# Altium PCB ChassisController.PcbDoc (part 1 of 2)
Units mm, origin at the board's own origin, x right, y up, seen from the top; angles counter-clockwise.
Board outline 110.4 x 66.5 mm, 2 copper layers (Top Layer, Bottom Layer), stack 1.906 mm thick; 125 components, 214 nets, 559 pads, 255 vias.
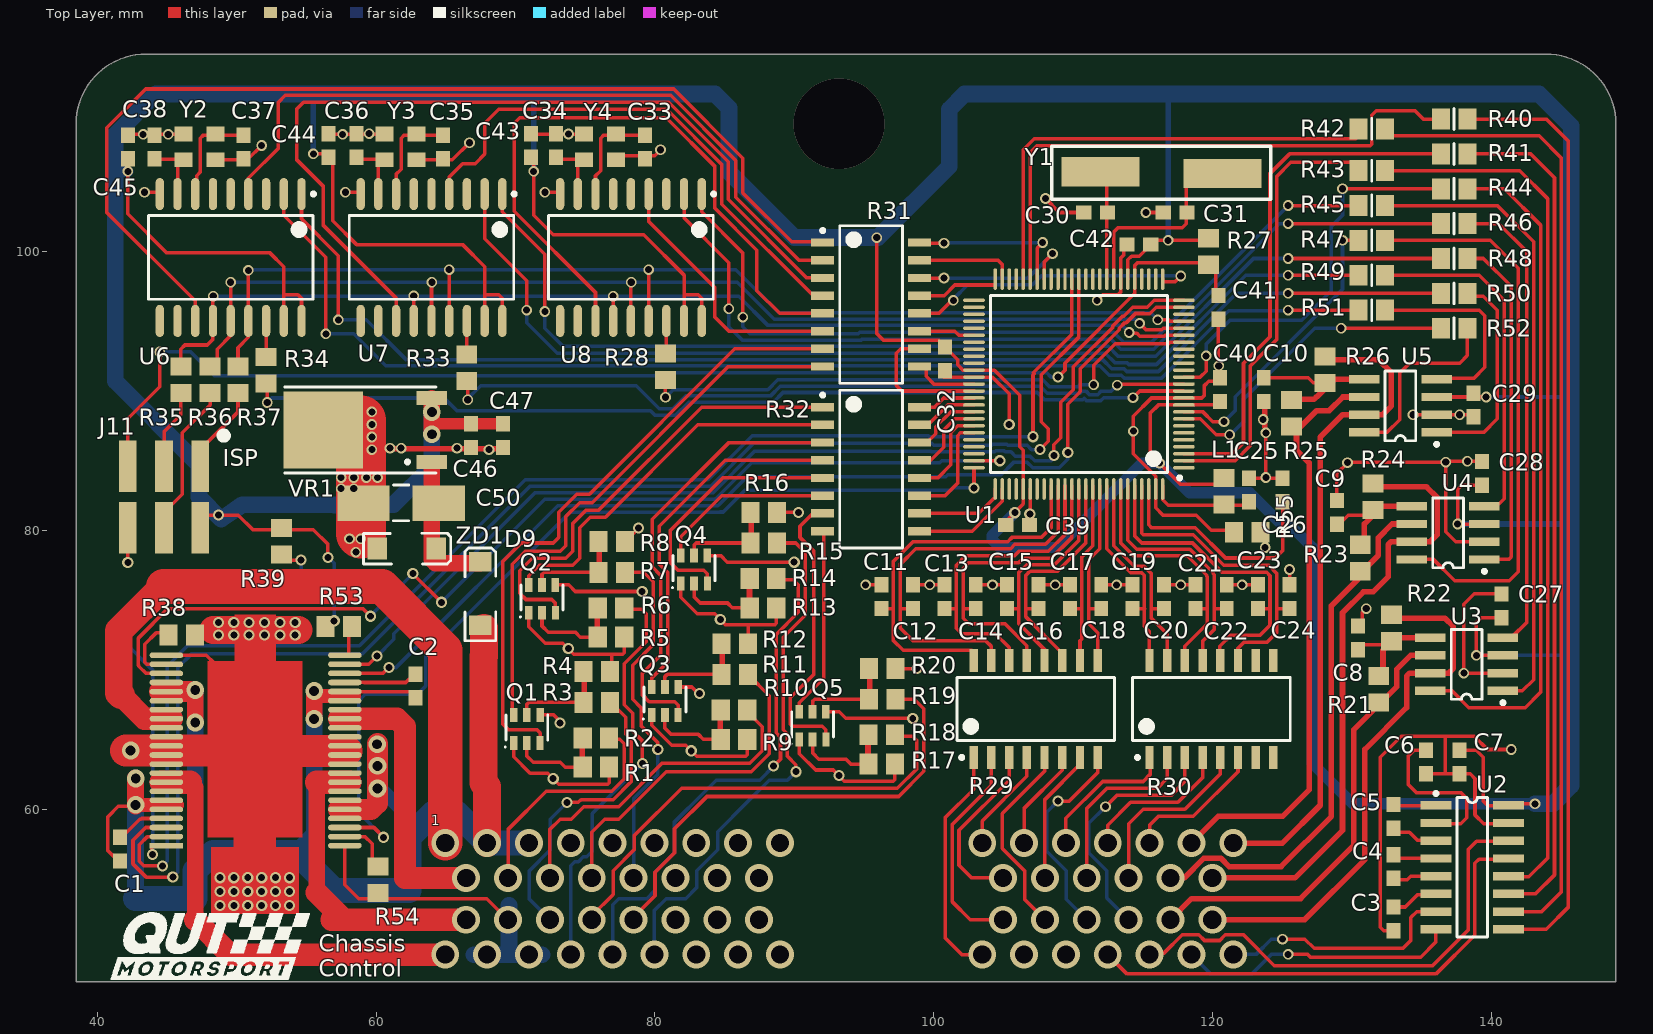
[diagram p0: Top Layer view]
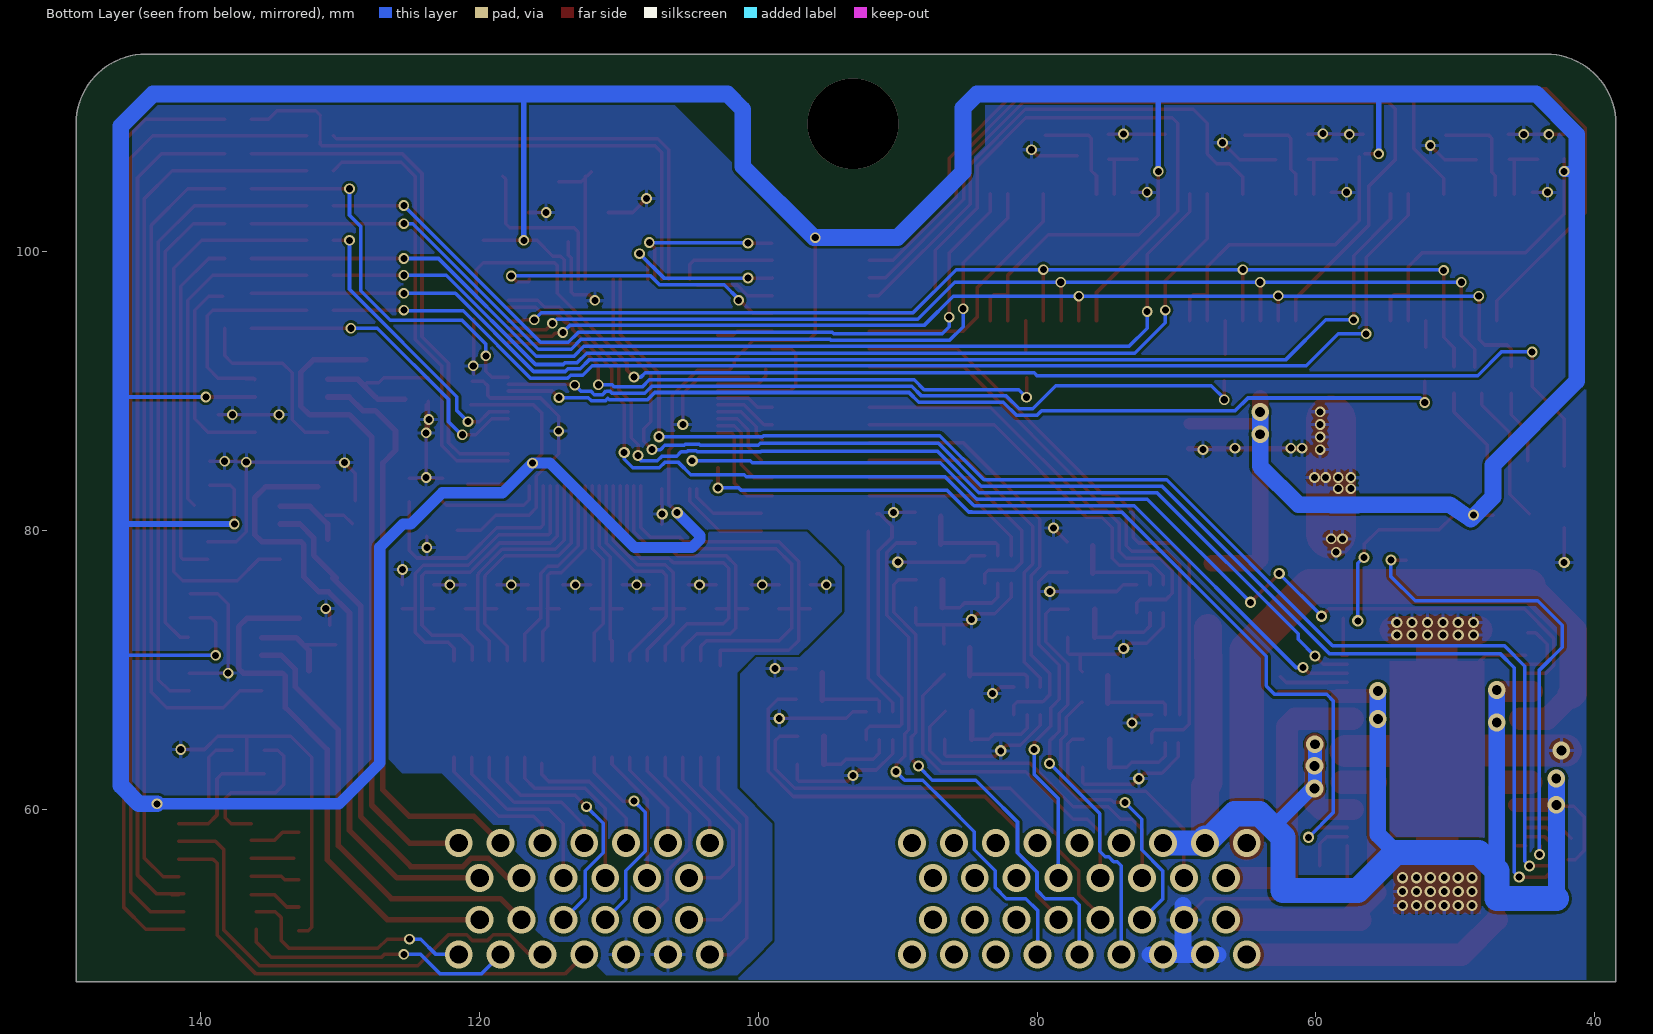
[diagram p1: Bottom Layer view, seen from below]

## Layer stack, top to bottom
Top Solder: solder mask 0.0102, Solder Resist, Dk 3.5
Top Layer: signal copper 0.203
Dielectric1: core 1.5, FR-4, Dk 4.8
Bottom Layer: signal copper 0.203
Bottom Solder: solder mask 0.0102, Solder Resist, Dk 3.5

## Board outline
38.497,47.652 148.897,47.652 148.897,109.152 ccw(c143.897,109.152) 143.897,114.152 43.497,114.152 ccw(c43.497,109.152) 38.497,109.152

## Design rules (kind name [scope] priority, off if disabled: settings)
Clearance [All] p1: gap=0.2 ignorepadtopadclearanceinfootprint=FALSE except(0: Arc-Hole Track-Hole SMDPad-Hole THPad-Hole Via-Hole Fill-Hole Poly-Hole Region-Hole Text-Hole)
FabricationTestPointUsage TestPointUsage [All] p1: valid=0 allowmultiple=FALSE
FabricationTestpoint Testpoint [All] p1: side=3 testpointundercomponent=TRUE minsize=1.016 maxsize=2.54 preferedsize=1.524 minholesize=0 maxholesize=1.016 preferedholesize=0.813 testpointgrid=0.025 allowsidetop=TRUE allowsidebottom=TRUE usegrid=TRUE gridtolerance=0
HoleSize [All] p1: absolutevalues=TRUE maxlimit=10 minlimit=0.025 maxpercent=80.000 minpercent=20.000
PolygonConnect [All] p1: connectstyle=Relief reliefconductorwidth=0.254 reliefentries=4 polygonreliefangle="90 Angle" airgapwidth=0.254
RoutingVias [All] p1: holewidth=0.6 width=1 viastyle="Through Hole" minholewidth=0.5 minwidth=0.5 maxholewidth=10 maxwidth=5
SilkToSolderMaskClearance SilkscreenOverComponentPads [IsPad] p1: minsilkscreentomaskgap=0.254 clearancetoexposedcopper=TRUE
SolderMaskExpansion [(IsVia)] p1: expansion=-1 istentingtop=FALSE
Width [All] p1: maxlimit=10 minlimit=0.2 preferedwidth=0.254 minimp=50.000000 maximp=50.000000 favimp=50.000000
26 further rules are at their usual default settings.

## Components (designator, comment, footprint, x,y, rotation, side; value= is the part's Value field where it differs from the comment)
C1 "Comment" J1-0603 41.625,57.15 r90 top
C2 "Comment" J1-0603 62.825,68.85 r90 top
C3 "Comment" J1-0603 132.95,52.15 r270 top
C4 "Comment" J1-0603 132.95,55.9 r270 top
C5 "Comment" J1-0603 132.95,59.5 r270 top
C6 "Comment" J1-0603 135.3,63.4 r90 top
C7 "Comment" J1-0603 137.7,63.4 r270 top
C8 "Comment" J1-0603 130.4,72.3 r270 top
C9 "Comment" J1-0603 128.9,81.3 r270 top
C10 "Comment" J1-0603 123.65,90.1 r90 top
C11 "Comment" J1-0603 96.25,75.25 r270 top locked
C12 "Comment" J1-0603 98.5,75.25 r270 top locked
C13 "Comment" J1-0603 100.75,75.25 r270 top locked
C14 "Comment" J1-0603 103,75.25 r270 top locked
C15 "Comment" J1-0603 105.25,75.25 r270 top locked
C16 "Comment" J1-0603 107.5,75.25 r270 top locked
C17 "Comment" J1-0603 109.75,75.25 r270 top locked
C18 "Comment" J1-0603 112,75.25 r270 top locked
C19 "Comment" J1-0603 114.25,75.25 r270 top locked
C20 "Comment" J1-0603 116.5,75.25 r270 top locked
C21 "Comment" J1-0603 118.75,75.25 r270 top locked
C22 "Comment" J1-0603 121,75.25 r270 top locked
C23 "Comment" J1-0603 123.25,75.25 r270 top locked
C24 "Comment" J1-0603 125.5,75.25 r270 top
C25 "Comment" J1-0603 122.6,82.9 r90 top
C26 "Comment" J1-0603 125,82.9 r90 top
C27 "Comment" J1-0603 140.7,74.6 r270 top
C28 "Comment" J1-0603 139.3,84.1 r270 top
C29 "Comment" J1-0603 138.7,89 r270 top
C30 "Comment" J1-0603 111.6,102.8 r180 top
C31 "Comment" J1-0603 117.3,102.8 r0 top
C32 "Comment" J1-0603 100.8,92.3 r270 top
C33 "Comment" J1-0603 79.3,107.5 r270 top
C34 "Comment" J1-0603 72.9,107.6 r270 top
C35 "Comment" J1-0603 64.8,107.5 r270 top
C36 "Comment" J1-0603 58.6,107.6 r270 top
C37 "Comment" J1-0603 50.5,107.5 r270 top
C38 "Comment" J1-0603 44.1,107.5 r270 top
C39 "Comment" J1-0603 106,80.4 r0 top
C40 "Comment" J1-0603 120.5,90.1 r90 top
C41 "Comment" J1-0603 120.4,96 r90 top
C42 "Comment" J1-0603 114.7,100.5 r180 top
C43 "Comment" J1-0603 71.1,107.6 r270 top
C44 "Comment" J1-0603 56.6,107.6 r270 top
C45 "Comment" J1-0603 42.2,107.5 r270 top
C46 "Comment" J1-0603 66.8,86.8 r270 top
C47 "Comment" J1-0603 69.1,86.8 r270 top
C50 "Comment" 6332[2512] 61.6,82.4 r180 top
D9 "Comment" SMC#1 67.475,74 r90 top
J11 "ISP" ISP_SMD_6PIN 44.8,82.4 r270 top
L1 "Comment" 2012[0805]#1 120.8,82.8 r270 top
Q1 "Comment" SOT23-6 70.816,65.575 r0 top
Q2 "Comment" SOT23-6 71.9,74.9 r0 top
Q3 "Comment" SOT23-6 80.716,67.575 r0 top
Q4 "Comment" SOT23-6 82.8,77 r0 top
Q5 "Comment" SOT23-6 91.3,65.8 r0 top
R1 "Comment" 2012[0805]#1 75.766,63.025 r0 top
R2 "Comment" 2012[0805]#1 75.766,65.125 r0 top
R3 "Comment" 2012[0805]#1 75.816,67.675 r0 top
R4 "Comment" 2012[0805]#1 75.816,69.875 r0 top
R5 "Comment" 2012[0805]#1 76.85,72.35 r0 top
R6 "Comment" 2012[0805]#1 76.85,74.45 r0 top
R7 "Comment" 2012[0805]#1 76.9,77 r0 top
R8 "Comment" 2012[0805]#1 76.9,79.2 r0 top
R9 "Comment" 2012[0805]#1 85.666,65.025 r0 top
R10 "Comment" 2012[0805]#1 85.666,67.125 r0 top
R11 "Comment" 2012[0805]#1 85.716,69.675 r0 top
R12 "Comment" 2012[0805]#1 85.716,71.875 r0 top
R13 "Comment" 2012[0805]#1 87.75,74.45 r0 top
R14 "Comment" 2012[0805]#1 87.75,76.55 r0 top
R15 "Comment" 2012[0805]#1 87.8,79.1 r0 top
R16 "Comment" 2012[0805]#1 87.8,81.3 r0 top
R17 "Comment" 2012[0805]#1 96.25,63.25 r0 top
R18 "Comment" 2012[0805]#1 96.25,65.35 r0 top
R19 "Comment" 2012[0805]#1 96.3,67.9 r0 top
R20 "Comment" 2012[0805]#1 96.3,70.1 r0 top
R21 "Comment" 2012[0805]#1 131.9,68.605 r270 top
R22 "Comment" 2012[0805]#1 132.8,73.005 r270 top
R23 "Comment" 2012[0805]#1 130.572,78.026 r270 top
R24 "Comment" 2012[0805]#1 131.472,82.426 r270 top
R25 "Comment" 2012[0805]#1 125.65,88.4 r270 top
R26 "Comment" 2012[0805]#1 128.05,91.535 r270 top
R27 "Comment" 2012[0805]#1 119.7,100 r270 top
R28 "Comment" 2012[0805]#1 80.75,91.75 r90 top
R29 "10K 8pack" SO-16 107.3,67.2 r0 top locked
R30 "10K 8pack" SO-16 119.9,67.2 r0 top locked
R31 "1K 8pack" SO-16 95.5,96.2 r270 top
R32 "1K 8pack" SO-16 95.5,84.4 r270 top
R33 "Comment" 2012[0805]#1 66.5,91.675 r90 top
R34 "Comment" 2012[0805]#1 52.1,91.5 r90 top
R35 "Comment" 2012[0805]#1 46,90.8 r90 top
R36 "Comment" 2012[0805]#1 48.1,90.8 r90 top
R37 "Comment" 2012[0805]#1 50.1,90.8 r90 top
R38 "Comment" 2012[0805]#1 46.075,72.5 r180 top
R39 "Comment" 2012[0805]#1 53.225,79.225 r90 top
R40 "Comment" 0805_SAE 137.3,109.5 r270 top
R41 "Comment" 0805_SAE 137.3,107 r270 top
R42 "Comment" 0805_SAE 131.4,108.8 r270 top
R43 "Comment" 0805_SAE 131.4,105.8 r270 top
R44 "Comment" 0805_SAE 137.3,104.5 r270 top
R45 "Comment" 0805_SAE 131.4,103.3 r270 top
R46 "Comment" 0805_SAE 137.3,102 r270 top
R47 "Comment" 0805_SAE 131.4,100.8 r270 top
R48 "Comment" 0805_SAE 137.3,99.5 r270 top
R49 "Comment" 0805_SAE 131.4,98.3 r270 top
R50 "Comment" 0805_SAE 137.3,97 r270 top
R51 "Comment" 0805_SAE 131.4,95.8 r270 top
R52 "Comment" 0805_SAE 137.3,94.5 r270 top
R53 "Comment" 2012[0805]#1 57.325,73.1 r180 top
R54 "Comment" 2012[0805]#1 60.15,54.95 r90 top
R55 "Comment" 2012[0805]#1 122.475,79.875 r0 top
U1 "main" SOT407-1_L 110.4,90.5 r180 top locked
U2 "Comment" SOIC16 138.6,55.845 r270 top
U3 "CAN xcvr" SO8 138.2,70.405 r90 top
U4 "CAN xcvr" SO8 136.872,79.826 r90 top
U5 "CAN xcvr" SO8 133.45,88.935 r90 top
U6 "Comment" SOL-18_N 49.575,99.575 r270 top
U7 "Comment" SOL-18_N 63.975,99.575 r270 top
U8 "Comment" SOL-18_N 78.275,99.575 r270 top
VR1 "" 369A-13 59.9,87.2 r90 top
Y1 "Comment" 2012[0805]#2 119.75,105.625 r180 top
Y2 "Comment" SOT223 50.1,109.825 r270 top
Y3 "Comment" SOT223 64.5,109.825 r270 top
Y4 "Comment" SOT223 78.8,109.825 r270 top
ZD1 "Comment" SMC#2 60.6,78.7 r0 top

## Footprints (in the part's own frame and the unit in brackets; to place one, negate y for a bottom-side part, rotate by r counter-clockwise, add the part's x,y. Pads: shape width x height; smd on the part's side, far side on the other; paste and mask are expansions set on the pad)
369A-13 [mm] "D-PAK/TO-252-AA; 3 Leads (1 Cropped); Body 10.3 (inc. leads) x 6.7 mm (LxW max)"
  rect 1x2.2 smd: 1(-2.285,-4.1) 3(2.285,-4.1)
  rect 5.5x5.7 smd: 4(0,3.7)
  silkscreen extent -3.09,-4.4 3.09,6.45
0805_SAE [mm]
  rect 1.5x1.3 smd: 1(0,-0.95) 2(0,0.95)
  silkscreen extent -0.75,0 0.75,0, body extent -0.67,-1.05 0.68,1.05, height 0.6
2012[0805]#1 [mm] "Chip Resistor; Body 2.0 x 1.3 mm (LxW typ)"
  rect 1.3x1.5 smd: 1(-0.95,0) 2(0.95,0)
2012[0805]#2 [mm] "Chip Resistor; Body 2.0 x 1.3 mm (LxW typ)"
  rect 5.6x2.1 smd: 1(-0.95,0.025) 2(7.8,-0.1)
6332[2512] [mm] "Chip Resistor; Body 6.3 x 3.2 mm (LxW typ)"
  rect 3.75x2.55 smd: 1(-2.9,0.45) 2(2.5,0.45)
  silkscreen extent -0.75,-0.85 0.35,1.7
ISP_SMD_6PIN [mm]
  rect 3.68x1.27 smd: 1(-2.2,2.6) 2(2.2,2.6) 3(-2.2,0) 4(2.2,0) 5(-2.2,-2.6) 6(2.2,-2.6)
  silkscreen extent -4.66,4.02 -4.14,4.53, body extent -3.75,-3.81 3.75,3.81, height 9.7
J1-0603 [mm] "Chip Resistor; Body 1.6 x 0.8 mm (LxW typ)"
  rect 1.1x1 smd: 1(-0.85,0) 2(0.85,0)
SMC#1 [mm] "DO-214-AB/SMC; 2 C-Bend Leads; Body 7.9 x 5.9 mm, inc. leads (LxW)"
  rect 1.4x1.64 smd: 1(-0.8,0) 2(3.75,0)
  silkscreen extent -1.91,-1.1 4.75,1.1
SMC#2 [mm] "DO-214-AB/SMC; 2 C-Bend Leads; Body 7.9 x 5.9 mm, inc. leads (LxW)"
  rect 1.4x1.58 smd: 1(-0.52,0) 2(3.72,0)
  silkscreen extent -1.5,-1.1 4.75,1.1
SO8 [mm] "Small Outline; 8 Leads; Body Width 3.9 mm; Pitch 1.27 mm"
  rect 0.6x2.2 smd: 1(-1.905,-2.6) 2(-0.635,-2.6) 3(0.635,-2.6) 4(1.905,-2.6) 5(1.905,2.6) 6(0.635,2.6) 7(-0.635,2.6) 8(-1.905,2.6)
  silkscreen extent -2.88,-2.72 2.5,1.1
SO-16 [mm] "Small Outline; 16 Leads; Body Width 5.6 mm; Pitch 1.27 mm"
  rect 0.6x1.65 smd: 1(-4.445,-3.475) 2(-3.175,-3.475) 3(-1.905,-3.475) 4(-0.635,-3.475) 5(0.635,-3.475) 6(1.905,-3.475) 7(3.175,-3.475) 8(4.445,-3.475) 9(4.445,3.475) 10(3.175,3.475) 11(1.905,3.475) 12(0.635,3.475) 13(-0.635,3.475) 14(-1.905,3.475) 15(-3.175,3.475) 16(-4.445,3.475)
  silkscreen extent -5.65,-3.6 5.65,2.25
SOIC16 [mm] "Small Outline; 16 Leads; Body Width 3.9 mm; Pitch 1.27 mm"
  rect 0.6x2.2 smd: 1(-4.445,-2.6) 2(-3.175,-2.6) 3(-1.905,-2.6) 4(-0.635,-2.6) 5(0.635,-2.6) 6(1.905,-2.6) 7(3.175,-2.6) 8(4.445,-2.6) 9(4.445,2.6) 10(3.175,2.6) 11(1.905,2.6) 12(0.635,2.6) 13(-0.635,2.6) 14(-1.905,2.6) 15(-3.175,2.6) 16(-4.445,2.6)
  silkscreen extent -5.42,-2.72 5,1.1
SOL-18_N [mm] "SOIC, 18-Leads, Body 11.6x7.5mm, Pitch 1.27mm, IPC Medium Density"
  oval 2.3x0.6 smd: 1(-4.55,5.08) 2(-4.55,3.81) 3(-4.55,2.54) 4(-4.55,1.27) 5(-4.55,0) 6(-4.55,-1.27) 7(-4.55,-2.54) 8(-4.55,-3.81) 9(-4.55,-5.08) 10(4.55,-5.08) 11(4.55,-3.81) 12(4.55,-2.54) 13(4.55,-1.27) 14(4.55,0) 15(4.55,1.27) 16(4.55,2.54) 17(4.55,3.81) 18(4.55,5.08)
  silkscreen extent -4.67,-5.9 3,6.06, body extent -3.8,-5.95 3.8,5.95, height 2.65
SOT23-6 [mm] "SOT-23/SC-74A; 5 Leads; Body 3.1 x 3 mm, inc. leads (LxW max)"
  rect 0.55x1 smd: 1(-0.95,-0.8) 2(0,-0.8) 4(0.95,1.2) 5(0,1.2) 6(-0.95,1.2)
  rect 0.5x1 smd: 3(0.95,-0.8)
  silkscreen extent -1.6,-1.15 1.5,1.2
SOT223 [mm] "SOT-223/SC-73; 4 Leads; Body 6.7 x 7.3 mm, inc. leads (LxW max)"
  rect 1.05x1.3 smd: 1(3.25,-3.9) 2(3.25,-1.6) 3(1.4,-1.6) 4(1.4,-3.9)
SOT407-1_L [mm] "Thin QFP, 100-Leads, Body 14x14mm, Pitch 0.5mm, IPC High Density"
  oval 1.55x0.25 smd: 1(-7.525,6) 2(-7.525,5.5) 3(-7.525,5) 4(-7.525,4.5) 5(-7.525,4) 6(-7.525,3.5) 7(-7.525,3) 8(-7.525,2.5) 9(-7.525,2) 10(-7.525,1.5) 11(-7.525,1) 12(-7.525,0.5) 13(-7.525,0) 14(-7.525,-0.5) 15(-7.525,-1) 16(-7.525,-1.5) 17(-7.525,-2) 18(-7.525,-2.5) 19(-7.525,-3) 20(-7.525,-3.5) 21(-7.525,-4) 22(-7.525,-4.5) 23(-7.525,-5) 24(-7.525,-5.5) 25(-7.525,-6) 51(7.525,-6) 52(7.525,-5.5) 53(7.525,-5) 54(7.525,-4.5) 55(7.525,-4) 56(7.525,-3.5) 57(7.525,-3) 58(7.525,-2.5) 59(7.525,-2) 60(7.525,-1.5) 61(7.525,-1) 62(7.525,-0.5) 63(7.525,0) 64(7.525,0.5) 65(7.525,1) 66(7.525,1.5) 67(7.525,2) 68(7.525,2.5) 69(7.525,3) 70(7.525,3.5) 71(7.525,4) 72(7.525,4.5) 73(7.525,5) 74(7.525,5.5) 75(7.525,6)
  oval 0.25x1.55 smd: 26(-6,-7.525) 27(-5.5,-7.525) 28(-5,-7.525) 29(-4.5,-7.525) 30(-4,-7.525) 31(-3.5,-7.525) 32(-3,-7.525) 33(-2.5,-7.525) 34(-2,-7.525) 35(-1.5,-7.525) 36(-1,-7.525) 37(-0.5,-7.525) 38(0,-7.525) 39(0.5,-7.525) 40(1,-7.525) 41(1.5,-7.525) 42(2,-7.525) 43(2.5,-7.525) 44(3,-7.525) 45(3.5,-7.525) 46(4,-7.525) 47(4.5,-7.525) 48(5,-7.525) 49(5.5,-7.525) 50(6,-7.525) 76(6,7.525) 77(5.5,7.525) 78(5,7.525) 79(4.5,7.525) 80(4,7.525) 81(3.5,7.525) 82(3,7.525) 83(2.5,7.525) 84(2,7.525) 85(1.5,7.525) 86(1,7.525) 87(0.5,7.525) 88(0,7.525) 89(-0.5,7.525) 90(-1,7.525) 91(-1.5,7.525) 92(-2,7.525) 93(-2.5,7.525) 94(-3,7.525) 95(-3.5,7.525) 96(-4,7.525) 97(-4.5,7.525) 98(-5,7.525) 99(-5.5,7.525) 100(-6,7.525)
  silkscreen extent -7.35,-6.35 6.35,6.85, body extent -7,-7 7,7, height 1.6

## Part data
J11: library part ISP_SMD
L1 R1 R2 R3 R4 R5 R6 R7 R8 R9 R10 R11 R12 R13 R14 R15 R16 R17 R18 R19 R20 R21 R22 R23 R24 R25 R26 R27 R28 R33 R34 R35 R36 R37 R38 R39 R53 R54 R55 Y1: library part "Res Semi"
Q1 Q2 Q3 Q4 Q5: library part "SW DPDT"
U1: library part CMP-0095-00520-1, "8-bit AVR Microcontroller, 1.8-5.5V, 4MHz, 128KB Flash, 4KB EEPROM, 8KB SRAM, 86 GPIO pins, 100-pin TQFP, Industrial Grade (-40°C to 85°C), Pb-Free, Reel"
U3 U4 U5: library part "SW DIP-4"

## Free pads (board coordinates)
  rect 2.4x0.4 smd: 1(44.964,57.401)
  oval 2.4x0.4 smd: 2(44.964,58.051) 3(44.964,58.701) 4(44.964,59.351) 5(44.964,60.001) 6(44.964,60.651) 7(44.964,61.301) 8(44.964,61.951) 9(44.964,62.601) 10(44.964,63.251) 11(44.964,63.901) 12(44.964,64.551) 13(44.964,65.201) 14(44.964,65.851) 15(44.964,66.501) 16(44.964,67.151) 17(44.96,67.796) 18(44.96,68.446) 19(44.964,69.101) 20(44.964,69.751) 21(44.964,70.401) 22(44.964,71.051) 23(57.764,71.051) 24(57.764,70.401) 25(57.764,69.751) 26(57.764,69.101) 27(57.764,68.451) 28(57.75,67.796) 29(57.764,67.151) 30(57.764,66.501) 31(57.76,65.846) 32(57.764,65.201) 33(57.764,64.551) 34(57.764,63.901) 35(57.764,63.251) 36(57.764,62.601) 37(57.764,61.951) 38(57.764,61.301) 39(57.764,60.651) 40(57.764,60.001) 41(57.764,59.351) 42(57.764,58.701) 43(57.764,58.051) 44(57.764,57.401)

## Via types
v1: diameter 0.762, hole 0.508, Top Layer to Bottom Layer, 111 vias
v2: diameter 0.8, hole 0.5, Top Layer to Bottom Layer, 71 vias
v3: diameter 2, hole 1.3, Top Layer to Bottom Layer, 60 vias
v4: diameter 1.27, hole 0.711, Top Layer to Bottom Layer, 12 vias
v5: diameter 6.5, hole 6.5, Top Layer to Bottom Layer, 1 vias

## Nets (pads, with @x,y where several pads share a name; then routed paths per layer and width w, separated by ;. In a path a pad name is that pad's centre, name@x,y a point inside that pad or via, vN(x,y) a via of type N, cw(c..) or ccw(c..) an arc to the next point about the centre after c; other vN are vias at no path point)
3V3: 
5V: C7.1 C27.2 C28.2 C29.1 C32.1 C39.1 C40.1 C42.1 C43.2 C44.2 C45.2 C46.1 C47.1 J11.2 L1.1 R27.1 R39.2 R53.2 U1.10 U1.31 U1.61 U1.80 U2.16 U3.3 U4.3 U5.3 U6.17 U6.18 U7.17 U7.18 U8.17 U8.18 VR1.3 | length 496.4
  Top Layer w0.254: C45.2@42.2,106.65 42.2,102.7 45,99.9 52.4,99.9 53.385,98.915 53.385,96.9 ; J11.2@47.3,81.1 50.125,81.1 51.175,80.05 55.5,80.05 56.55,79 v2(56.55,78.05) ; U6.17@53.385,95.025 53.385,96.9 ; U6.18@54.655,95.025 54.655,96.645 54.4,96.9 53.385,96.9 ; v1(55.5,107) C44.2@56.5,107 ; C44.2@56.9,106.8 56.9,102.2 58.6,100.5 66.2,100.5 67.785,98.915 67.785,96.9 ; U7.17@67.785,95.025 67.785,96.9 ; U7.18@69.055,95.025 69.055,96.645 68.8,96.9 67.785,96.9 ; C43.2@71.3,106.6 71.3,102.6 72.7,101.2 79.2,101.2 82.085,98.315 82.085,96.9 ; U8.17@82.085,95.025 82.085,96.9 ; U8.18@83.355,95.025 83.355,96.645 83.1,96.9 82.085,96.9 ; v1(95.9,101) 95.9,94.125 96.372,93.653 100.347,93.653 C32.1@100.6,93.4 ; C32.1@100.8,93.15 101.7,92.25 101.7,91.886 102.086,91.5 104.342,91.5 106.15,89.692 106.15,86.006 106.4,85.756 U1.80@106.4,82.975 106.4,81.9 105.4,80.9 C39.1@105.4,80.6 ; U1.31@113.9,98.025 113.9,99.4 114.173,99.673 114.723,99.673 115.85,100.8 R27.1@119.7,100.8 ; C40.1@120.6,89 116.1,89 115.5,88.4 115.5,85.5 117.7,83.3 L1.1@120.8,83.3 ; U5.3@136.05,89.57 v1(139.6,89.57) ; C7.1@137.7,64.25 138.895,64.25 139.4,63.745 139.4,60.6 139.755,60.245 U2.16@141.55,60.245 ; C28.2@139.3,83.25 137.85,83.25 137.557,82.957 v1(137.557,80.461) U4.3@139.472,80.461 ; C27.2@140.7,73.75 139.25,73.75 138.9,73.4 v1(138.9,71.04) U3.3@140.8,71.04 ; U2.16@142.15,60.45 142.2,60.4 v1(143.1,60.4)
  Top Layer w0.8: 63.95,87.65 C47.1@69.1,87.65
  Top Layer w1.2: v4(64,86.9) VR1.3@64,89.485
  Bottom Layer w0.254: v2@56.425,78.225 57,77.65 v2(57,73.525) ; v1(138.9,71.04) 145.54,71.04 ; v1(139.6,89.57) 145.47,89.57
  Bottom Layer w0.4: v1(55.5,107) 55.5,111.2 ; v1(71.3,105.75) 71.3,111.3 ; v1(116.8,100.8) 116.8,111.225 ; v1(137.557,80.461) 145.564,80.461
  Bottom Layer w0.8: 41.55,105.75 v1(42.2,105.75) ; v2(105.8,81.275) 104.175,79.65 104.175,79.35 104.75,78.775 108.85,78.775 114.925,84.85 116.175,84.85 118.325,82.7 122.65,82.7 124.889,80.461 125.464,80.461 127.125,78.8 127.125,63.325 130.05,60.4 v1@143.125,60.4
  Bottom Layer w1.2: v4@64,88.2 64,84.6 61.25,81.85 58.92,81.85 58.889,81.819 57.011,81.819 56.98,81.85 50.425,81.85 48.9,80.8 47.3,82.4 47.3,84.7 41.3,90.7 41.3,108.4 44.2,111.3 84.3,111.3 85.3,110.3 85.3,105.7 90,101 96,101 101.1,106.1 101.1,110.2 102.2,111.3 143.4,111.3 145.7,109 145.7,61.7 144.4,60.4 v1(143.1,60.4)
  other v1: 116.175,84.825
  other v2: 48.7,81.1
  other v4: 64,88.5
5V_fused: 
AGND: C11.1 C12.1 C13.1 C14.1 C15.1 C16.1 C17.1 C18.1 C19.1 C20.1 C21.1 C22.1 C23.1 C24.1 R55.2 | length 15.5
  Top Layer w0.254: v1(95.1,76.1) C11.1@96.25,76.1 ; C12.1@98.5,76.1 C13.1@100.5,76.1 ; C14.1@103,76.1 C15.1@105,76.1 ; C16.1@107.8,76.1 C17.1@109.75,76.1 ; C18.1@112,76.1 C19.1@114,76.1 ; C20.1@116.5,76.1 C21.1@118.75,76.1 ; C22.1@121,76.1 C23.1@123.25,76.1 ; v1(123.75,78.775) R55.2@123.75,79.575 ; C24.1@125.5,76.1 v1(125.5,77.2)
  other v1: 99.7,76.1 104.2,76.1 108.7,76.1 113.1,76.1 117.7,76.1 122.1,76.1
  other v3: 106.463,49.585 109.463,49.585
AN0: 
AN1: R29.4 | length 7.5
  Top Layer w0.254: v3(103.463,57.585) 103.463,59.163 106.665,62.365 R29.4@106.665,63.725
AN1_filt: C14.2 R29.13 U1.87 | length 23.4
  Top Layer w0.254: 102.1,74.4 C14.2@103,74.4 ; R29.13@106.665,70.675 106.665,71.735 105.1,73.3 102.5,73.3 102.1,73.7 102.1,77.3 102.5,77.7 106.1,77.7 106.4,78 108.4,78 109.9,79.5 U1.87@109.9,83.2
AN2: R29.6 | length 7.3
  Top Layer w0.254: v3(106.463,57.585) 106.463,60.063 109.205,62.805 R29.6@109.205,63.725
AN2_filt: C16.2 R29.11 U1.89 | length 17.5
  Top Layer w0.254: 106.6,74.4 C16.2@107.5,74.4 ; R29.11@109.205,70.675 109.205,71.195 106.6,73.8 106.6,76.8 106.892,77.092 108.892,77.092 110.9,79.1 U1.89@110.9,83.2
AN3: R30.1 | length 9.9
  Top Layer w0.254: v3(109.463,57.585) 109.463,59.363 112.1,62 115,62 115.5,62.5 R30.1@115.5,63.3
AN3_filt: C19.2 R30.16 U1.92 | length 15.1
  Top Layer w0.254: U1.92@112.4,83.2 112.4,78.7 114.123,76.977 114.885,76.977 115.077,76.785 115.077,73.123 115.455,72.745 R30.16@115.455,70.675 ; C19.2@114.25,74.4 115.1,74.4
AN4: R30.4 | length 10.9
  Top Layer w0.254: v3(112.463,57.585) 112.463,58.863 114.1,60.5 117.5,60.5 119.265,62.265 R30.4@119.265,63.725
AN4_filt: C22.2 R30.13 U1.95 | length 18.6
  Top Layer w0.254: U1.95@113.9,83.2 113.9,79.3 114.554,78.646 118.358,78.646 120.031,76.973 120.031,76.893 120.1,76.824 120.1,72.9 119.265,72.065 R30.13@119.265,70.675 ; 120.1,74.4 C22.2@121,74.4
AN5: R30.6 | length 10.2
  Top Layer w0.254: v3(115.463,57.585) 115.463,58.863 116.1,59.5 118.6,59.5 121.805,62.705 R30.6@121.805,63.725
AN5_filt: C24.2 R30.11 U1.97 | length 23.6
  Top Layer w0.254: U1.97@114.9,83.2 114.9,79.8 115,79.7 118.589,79.7 120.789,77.5 124.004,77.5 124.6,76.904 124.6,72.7 123.9,72 122.25,72 121.805,71.555 R30.11@121.805,70.675 ; 124.6,74.4 C24.2@125.5,74.4
AN6: R29.3 | length 12.8
  Top Layer w0.254: v3(104.963,55.085) 102.715,55.085 101.8,56 101.8,58.5 105.395,62.095 R29.3@105.395,63.725
AN6_filt: C13.2 R29.14 U1.86 | length 22.9
  Top Layer w0.254: C13.2@100.75,74.4 101.6,74.4 ; R29.14@105.395,70.675 105.395,71.605 104.4,72.6 102,72.6 101.6,73 101.6,77.5 102.3,78.2 105.8,78.2 106.1,78.5 108.2,78.5 109.4,79.7 U1.86@109.4,83.2
AN7: R29.7 | length 9.7
  Top Layer w0.254: v3(107.963,55.085) 107.963,60.713 110.475,63.225 R29.7@110.475,63.725
AN7_filt: C17.2 R29.10 U1.90 | length 13.8
  Top Layer w0.254: C17.2@109.75,74.4 110.6,74.4 ; R29.10@110.475,70.675 110.475,72.075 110.6,72.2 110.6,78.1 111.4,78.9 U1.90@111.4,83.2
AN8: R30.2 | length 13.1
  Top Layer w0.254: v3(110.963,55.085) 110.963,60.063 112.4,61.5 116,61.5 116.725,62.225 R30.2@116.725,63.725
AN8_filt: C20.2 R30.15 U1.93 | length 15.4
  Top Layer w0.254: U1.93@112.9,83.2 112.9,78.9 114.369,77.431 115.074,77.431 115.6,76.904 115.6,73.7 116.725,72.575 R30.15@116.725,70.675 ; 115.6,74.4 C20.2@116.5,74.4
AN9: R30.5 | length 13.1
  Top Layer w0.254: v3(113.963,55.085) 113.963,58.963 115,60 118,60 120.535,62.535 R30.5@120.535,63.725
AN9_filt: C23.2 R30.12 U1.96 | length 24.1
  Top Layer w0.254: U1.96@114.4,83.2 114.4,79.6 114.9,79.1 118.547,79.1 120.485,77.162 120.485,77.148 120.633,77 123.862,77 124.1,76.762 124.1,73.2 123.4,72.5 121.3,72.5 120.5,71.7 R30.12@120.5,70.71 ; C23.2@123.25,74.4 124.1,74.4
AN10: R29.2 | length 15.7
  Top Layer w0.254: R29.2@104.125,63.725 104.125,61.725 101.3,58.9 101.3,53.4 102.615,52.085 v3(104.963,52.085)
AN10_filt: C12.2 R29.15 U1.85 | length 29.1
  Top Layer w0.254: 97.6,74.4 C12.2@98.5,74.4 ; R29.15@104.125,70.675 104.125,71.675 103.7,72.1 98.5,72.1 97.6,73 97.6,77.6 98.7,78.7 105.5,78.7 105.8,79 108,79 108.9,79.9 U1.85@108.9,83.2
AN11: R29.5 | length 14.2
  Top Layer w0.254: R29.5@107.935,63.725 107.935,62.735 104.9,59.7 104.9,57.2 106.5,55.6 106.5,53.548 v3(107.963,52.085)
AN11_filt: C15.2 R29.12 U1.88 | length 17.1
  Top Layer w0.254: C15.2@105.25,74.4 106.1,74.4 ; R29.12@107.935,70.675 107.935,71.465 106.1,73.3 106.1,77 106.646,77.546 108.646,77.546 110.4,79.3 U1.88@110.4,83.2
AN12: R29.8 | length 14.8
  Top Layer w0.254: v1(108.9,60.6) 109.7,60.6 111.745,62.645 R29.8@111.745,63.725
  Bottom Layer w0.254: v1(108.9,60.6) 108.1,59.8 108.1,57 109.5,55.6 109.5,53.548 v3(110.963,52.085)
AN12_filt: C18.2 R29.9 U1.91 | length 14
  Top Layer w0.254: 111.1,74.4 C18.2@112,74.4 ; R29.9@111.745,70.675 111.745,72.655 111.1,73.3 111.1,77.9 111.9,78.7 U1.91@111.9,83.2
AN13: R30.3 | length 18
  Top Layer w0.254: v1(112.3,60.2) 113.1,61 117,61 117.995,61.995 R30.3@117.995,63.725
  Bottom Layer w0.254: v1(112.3,60.2) 111.1,59 111.1,56.9 112.4,55.6 112.4,53.648 v3(113.963,52.085)
AN13_filt: C21.2 R30.14 U1.94 | length 18.9
  Top Layer w0.254: U1.94@113.4,83.2 113.4,79.1 114.308,78.192 118.17,78.192 119.577,76.785 119.577,76.705 119.6,76.682 119.6,73.3 117.995,71.695 R30.14@117.995,70.675 ; C21.2@118.75,74.4 119.6,74.4
AN14: R29.1 | length 16.9
  Top Layer w0.254: R29.1@102.855,63.725 102.855,61.455 100.8,59.4 100.8,50.8 102.015,49.585 v3(103.463,49.585)
AN14_filt: C11.2 R29.16 U1.84 | length 28.8
  Top Layer w0.254: C11.2@96.25,74.4 97.1,74.4 ; R29.16@102.7,70.3 102.7,71.4 97.8,71.4 97.1,72.1 97.1,77.8 98.5,79.2 105.3,79.2 105.6,79.5 107.7,79.5 108.4,80.2 U1.84@108.4,83.2
AN15: 
AN16: 
AN17: 
AN18: 
AN19: 
AN20: 
AN21: 
AN22: 
AN23: 
Aref: C26.1 U1.98 | length 17.1
  Top Layer w0.254: U1.98@115.4,83.2 115.4,80.4 115.6,80.2 118.731,80.2 120.906,78.025 124.475,78.025 125,78.55 C26.1@125,82.05
AVCC: C25.1 L1.2 U1.100 | length 7.5
  Top Layer w0.254: U1.100@116.4,83.2 116.4,82.2 116.8,81.8 122.35,81.8 C25.1@122.6,82.05
Batt12V: C1.1 C2.1 D9.1 pad.5 pad.6 pad.17 pad.18 pad.19 pad.27 pad.28 pad.39 pad.40 pad.41 | length 125.3
  Top Layer w0.254: C1.1@41.9,56.4 41.4,56.4 40.775,57.025 40.775,59.475 41.517,60.217 v4@42.759,60.217 ; pad.27@57.764,68.451 C2.1@62.675,68.451
  Top Layer w1: v4(42.759,60.329) 45.713,60.329 ; v4@55.992,68.135 58.404,68.135
  Top Layer w1.2: v4@42.759,60.217 v4@42.759,62.246 ; v4@47.035,66.222 v4(47.035,68.555) ; v4@55.56,66.476 v4@55.56,68.495
  Top Layer w1.5: pad.18@44.473,68.465 v4@46.685,68.465 ; pad.40@57.313,59.996 59.644,59.992 60.088,60.435 v4@60.096,64.722
  Top Layer w2: D9.1@67.75,73.025 67.75,70.95 67.7,71 67.7,61.9 67.963,61.637 v3(67.963,57.585)
  Bottom Layer w1: v4@60.082,64.702 60.077,61.734 63,58.8
  Bottom Layer w1.2: 42.759,53.6 v4@42.759,62.246 ; 47.035,56.275 v4(47.035,68.555) ; 54.275,56.9 55.559,58.184 v4(55.559,68.495)
  Bottom Layer w1.5: v3@67.963,57.937 v3@68.315,57.585
  Bottom Layer w1.8: 42.759,53.6 47.025,53.6 47.025,55.6 48.325,56.9 54.275,56.9 57,54.175 62.375,54.175 62.375,58 64.06,59.685 65.833,59.685 67.581,57.937 v3@67.963,57.937 ; v3@68.315,57.585 v3(70.963,57.585)
  other v4: 60.107,61.493 42.768,62.216 60.107,63.119 60.082,64.668 47.035,66.226 55.559,66.476
Batt_Filt: C50.1 D9.2 VR1.1 ZD1.2 | length 10.3
  Top Layer w1.2: VR1.1@64,84.6 64,77.9 64.25,77.65 D9.2@67.475,77.65
CAN_A_X1: C38.2 U6.8 Y2.1 | length 4.5
  Top Layer w0.254: C38.2@44.1,106.625 Y2.1@46.15,106.625 ; U6.8@45.765,104.125 Y2.1@45.765,106.54
CAN_A_X2: C37.1 U6.7 Y2.3 | length 7.6
  Top Layer w0.254: U6.7@47.135,104.025 47.135,105.435 47.4,105.7 47.4,108.135 47.59,108.325 48.5,108.325 C37.1@50.7,108.325
CAN_B_X1: C36.2 U7.8 Y3.1 | length 4.5
  Top Layer w0.254: C36.2@58.5,106.625 Y3.1@60.55,106.625 ; U7.8@60.165,104.125 Y3.1@60.165,106.54
CAN_B_X2: C35.1 U7.7 Y3.3 | length 7.5
  Top Layer w0.254: U7.7@61.435,104.125 61.435,105.535 61.8,105.9 61.8,108.135 61.99,108.325 62.9,108.325 C35.1@65.1,108.325
CAN_C_X1: C34.2 U8.8 Y4.1 | length 4.5
  Top Layer w0.254: C34.2@72.8,106.625 Y4.1@74.85,106.625 ; U8.8@74.465,104.125 Y4.1@74.465,106.54
CAN_C_X2: C33.1 U8.7 Y4.3 | length 7.5
  Top Layer w0.254: U8.7@75.735,104.125 75.735,105.435 76.1,105.8 76.1,108.135 76.29,108.325 77.2,108.325 C33.1@79.4,108.325
CAN_HI_A: R26.1 U5.7 | length 47.2
  Top Layer w0.4: v3(121.463,57.585) 124.985,57.585 127.7,60.3 127.7,86.7 129.3,88.3 132.165,88.3 132.8,88.935 132.8,91.335 131.9,92.235 R26.1@128.15,92.235
CAN_HI_B: R24.1 U4.7 | length 44.3
  Top Layer w0.4: v3(119.963,55.085) 125.885,55.085 129.3,58.5 129.3,74.1 130.8,75.6 131.5,75.6 132.572,76.672 132.572,78.976 132.787,79.191 135.587,79.191 136.1,79.704 136.1,82.348 135.322,83.126 R24.1@131.572,83.126
CAN_HI_C: R22.1 U3.7 | length 38.3
  Top Layer w0.4: v3(119.963,52.085) 126.585,52.085 130.9,56.4 130.9,64.3 133.9,67.3 133.9,69.555 134.115,69.77 136.915,69.77 137.25,70.105 137.25,73.105 136.65,73.705 R22.1@132.9,73.705
CAN_INT_A: R31.1 U6.12 | length 75.2
  Top Layer w0.254: U6.12@47.035,95.025 47.035,96.465 40.7,102.8 40.7,108.875 43.479,111.654 81.346,111.654 86.3,106.7 86.3,104.2 89.8,100.7 R31.1@92.3,100.7
CAN_INT_A_link: R31.16 U1.44 | length 11.5
  Top Layer w0.254: R31.16@99.03,100.6 v1(100.725,100.6) ; U1.44@107.4,98.025 107.4,100.25 v1(107.8,100.65)
  Bottom Layer w0.254: v1@100.75,100.625 v1@107.8,100.625
CAN_INT_B: R31.3 U7.12 | length 62.9
  Top Layer w0.254: U7.12@61.435,95.025 61.435,96.665 56.2,101.9 56.2,104.7 54.3,106.6 54.3,110.2 54.8,110.7 80.984,110.7 85.254,106.43 85.254,103.746 90.895,98.105 R31.3@92.025,98.105
CAN_INT_B_link: R31.14 U1.43 | length 12.3
  Top Layer w0.254: R31.14@98.975,98.105 98.98,98.1 v1(100.725,98.1) ; U1.43@107.9,98.025 107.9,99.25 v1(108.5,99.85)
  Bottom Layer w0.254: v1(100.725,98.1) 106.75,98.1 v1(108.5,99.85)
CAN_INT_C: R31.5 U8.12 | length 48.2
  Top Layer w0.254: U8.12@75.735,95.025 75.735,97.065 69.9,102.9 69.9,109.2 70.3,109.6 80.8,109.6 84.3,106.1 84.3,103.1 87.3,100.1 87.3,97.2 88.935,95.565 R31.5@92.025,95.565
CAN_INT_C_link: R31.12 U1.26 | length 21.5
  Top Layer w0.254: R31.12@98.975,95.565 100.365,95.565 101.3,96.5 v1(101.4,96.5) ; U1.26@116.4,98.025 116.4,97.9 116.45,97.85 117.3,97.85 v1(117.7,98.25)
  Bottom Layer w0.254: v1(101.4,96.5) 101.4,96.6 102.425,97.625 107.075,97.625 107.7,98.25 v1(117.7,98.25)
CAN_LO_A: R25.2 U5.6 | length 42
  Top Layer w0.4: v3(118.463,57.585) 120.378,59.5 125,59.5 126.9,61.4 126.9,84.85 126,85.75 126,87.15 127.435,88.585 128.335,88.585 129.32,89.57 U5.6@130.85,89.57
CAN_LO_B: R23.2 U4.6 | length 38.6
  Top Layer w0.4: v3@116.5,55.1 117.958,55.1 119.358,56.5 120.568,56.5 121.168,55.9 124.9,55.9 128.5,59.5 128.5,74.6 R23.2@130.5,76.6 ; R23.2@130.246,76.6 131.872,78.226 131.872,79.476 132.857,80.461 U4.6@134.272,80.461
  other v3: 116.963,55.085
CAN_LO_C: R21.2 U3.6 | length 32.1
  Top Layer w0.4: v3(116.963,52.085) 118.478,53.6 126.3,53.6 130.1,57.4 130.1,65.705 133.2,68.805 133.2,70.055 134.185,71.04 U3.6@135.6,71.04
CAN_RX_A: R51.2 U5.4 | length 15.6
  Top Layer w0.254: R51.2@132.35,95.8 139.1,95.8 139.5,95.4 139.5,91.7 138.7,90.9 136.2,90.9 136.097,90.797 136.097,90.887 U5.4@136.785,90.887
CAN_RX_A_link: R51.1 U6.2 | length 88.7
  Top Layer w0.254: U6.2@53.385,104.125 53.385,102.615 56.4,99.6 v1(56.4,94.1) ; v1(125.4,95.8) R51.1@130.45,95.8
  Bottom Layer w0.254: v1(56.4,94.1) 58.4,94.1 60.7,91.8 111.9,91.8 112.567,91.133 113.443,91.133 113.676,90.9 116.3,90.9 121.146,95.746 125.346,95.746 v1(125.4,95.8)
CAN_RX_B: R49.2 U4.4 | length 24.2
  Top Layer w0.254: R49.2@132.35,98.3 139.1,98.3 140.9,96.5 140.9,82.281 U4.4@140.419,81.8
CAN_RX_B_link: R49.1 U7.2 | length 74
  Top Layer w0.254: U7.2@67.785,104.125 67.785,100.915 70.8,97.9 v1(70.8,95.8) ; v1(125.4,98.3) R49.1@130.45,98.3
  Bottom Layer w0.254: v1(70.8,95.8) 70.8,94.9 72.992,92.708 112.292,92.708 112.959,92.041 113.819,92.041 113.96,91.9 115.958,91.9 122.358,98.3 v1(125.4,98.3)
CAN_RX_C: R46.2 U3.4 | length 33.8
  Top Layer w0.254: R46.2@138.25,102 140.5,102 142.5,100 142.5,73.4 141.457,72.357 U3.4@140.847,72.357
CAN_RX_C_link: R46.1 U8.2 | length 66.3
  Top Layer w0.254: U8.2@82.085,104.125 82.085,102.415 85.3,99.2 v1(85.3,95.9) ; v1(125.4,102) R46.1@136.35,102
  Bottom Layer w0.254: v1(85.3,95.9) 85.3,94.6 86.246,93.654 94.772,93.654 94.818,93.7 112.7,93.7 113.4,93 115.774,93 124.774,102 v1(125.4,102)
CAN_SPLIT_A: C10.2 R25.1 R26.2 U5.5 | length 10.7
  Top Layer w0.254: C10.2@123.65,90.95 126.835,90.95 127.2,90.585 R26.2@128.05,90.585
  Top Layer w0.4: R25.1@125.35,89.4 127.25,89.4 127.45,89.6 127.45,89.585 128.705,90.84 U5.5@130.85,90.84
CAN_SPLIT_A_link: 
CAN_SPLIT_B: C9.2 R23.1 R24.2 U4.5 | length 7.2
  Top Layer w0.254: C9.2@129.1,80.5 129.7,81.1 R24.2@130.998,81.1
  Top Layer w0.4: R23.1@130.872,79.376 130.872,80.476 132.127,81.731 U4.5@134.272,81.731
CAN_SPLIT_B_link: 
CAN_SPLIT_C: C8.2 R21.1 R22.2 U3.5 | length 7.3
  Top Layer w0.254: C8.2@130.3,71.8 R22.2@132.4,71.8
  Top Layer w0.4: R21.1@132.2,69.955 132.2,71.4 133.11,72.31 U3.5@135.6,72.31
CAN_SPLIT_C_link: 
CAN_SS_A: R34.2 U6.16 | length 1.9
  Top Layer w0.254: 52.115,93.15 U6.16@52.115,95.025
CAN_SS_A_link: R34.1 U1.12 | length 69.2
  Top Layer w0.254: v1(52.2,89.175) R34.1@52.2,90.7 ; v1(114.275,89.525) 114.75,90 U1.12@117.925,90
  Bottom Layer w0.254: v1(52.2,89.175) 52.525,89.5 64.875,89.5 65.8,88.575 79.675,88.575 80,88.25 81.475,88.25 82.417,89.192 88.476,89.192 89.176,89.892 107.423,89.892 107.931,89.384 110.668,89.384 110.77,89.486 110.969,89.288 111.931,89.288 112.168,89.525 v1(114.275,89.525)
CAN_SS_B: R33.2 U7.16 | length 2.4
  Top Layer w0.254: R33.2@66.515,92.625 U7.16@66.515,95.025
CAN_SS_B_link: R33.1 U1.13 | length 55.2
  Top Layer w0.254: v1(66.575,89.375) R33.1@66.575,90.725 ; v1@113.225,90.5 U1.13@117.925,90.5
  Bottom Layer w0.254: v1@66.525,89.4 67.495,90.37 78.645,90.37 80.295,88.72 81.28,88.72 82.206,89.646 88.288,89.646 88.988,90.346 107.611,90.346 108.119,89.838 110.48,89.838 110.638,89.996 110.903,89.996 111.157,89.742 111.743,89.742 111.98,89.979 112.704,89.979 v1(113.15,90.425) v1@113.15,90.349
CAN_SS_C: R28.2 U8.16 | length 2.1
  Top Layer w0.254: R28.2@80.815,92.9 U8.16@80.815,95.025
CAN_SS_C_link: R28.1 U1.19 | length 41.5
  Top Layer w0.254: v1(80.75,89.55) R28.1@80.75,90.95 ; v1(111.45,90.45) 111.45,91.85 113,93.4 116.85,93.4 116.95,93.5 U1.19@117.925,93.5
  Bottom Layer w0.254: v1(80.75,89.55) 81.3,90.1 88.1,90.1 88.8,90.8 107.799,90.8 108.307,90.292 110.292,90.292 110.45,90.45 v1(111.45,90.45)
CAN_STB_A: R52.2 U5.8 | length 13.6
  Top Layer w0.254: U5.8@130.85,87.03 132.48,87.03 133.4,87.95 133.4,91.3 134.1,92 137.7,92 138.25,92.55 R52.2@138.25,94.5